# EAGLE board imu_interface (EAGLE 4.16)
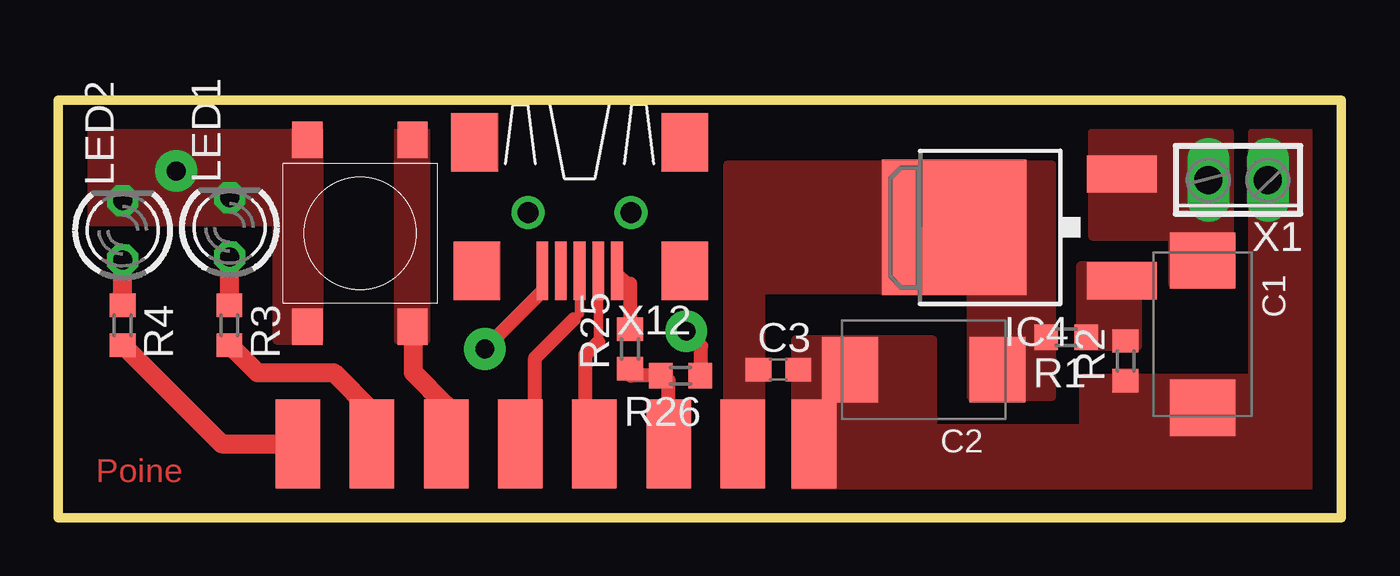
[diagram p0: board, top side]
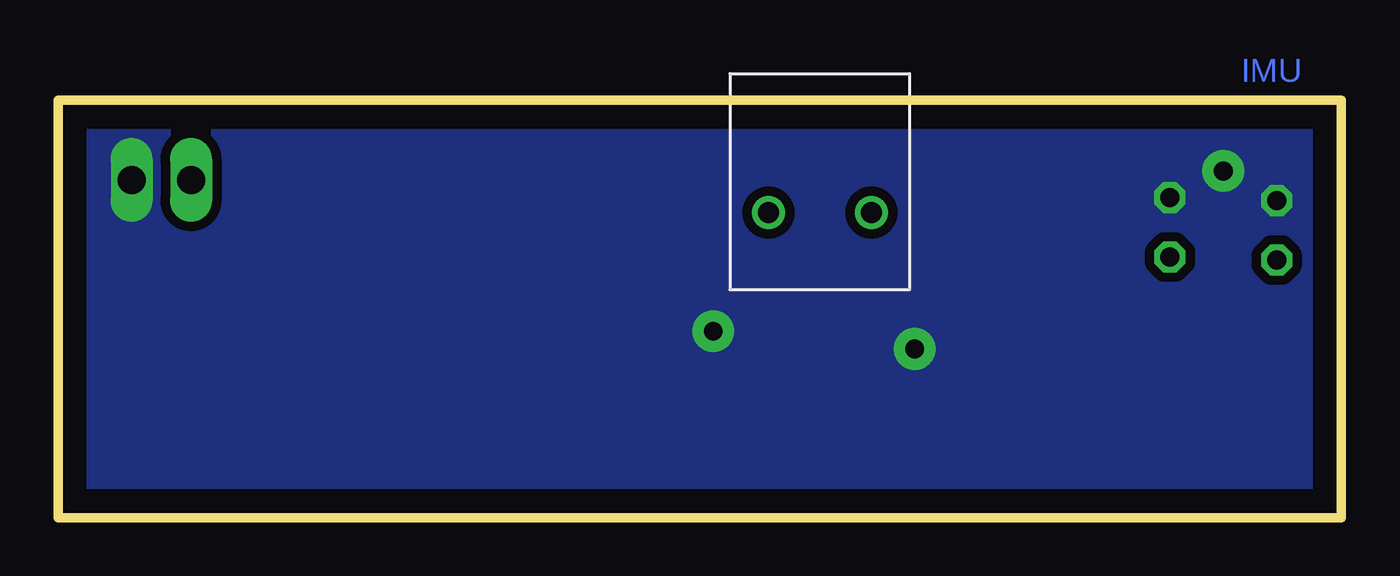
[diagram p1: board, bottom side, seen from below]

Size 54.91 x 17.89 mm. Coordinates in mm from the lower left corner, seen from the top.
Outline: 0,17.89 0,0 54.91,0 54.91,17.89 0,17.89
Copper layers (1*16): Top 0.035mm / dielectric 1.5mm / Bottom 0.035mm
Design rules "default": minimum track width 10mil, minimum drill 24mil, track to track 8mil, track to pad 8mil, pad to pad 8mil, via to via 8mil, smd to smd 8mil, copper to edge 40mil, drill to drill 8mil, minimum pad ring 10mil, minimum via ring 8mil, stop-mask expansion 4mil, vias tented up to drill 0mil, thermal gap 10mil

## Footprints (pad centres in the part's own frame; a part is rotated, then mirrored left to right if it is on the bottom)
SMC_D = smd 2.4 x 2.8: + -3.15,0; - 3.15,0
C0603 = smd 1.1 x 1: 1 -0.85,0; 2 0.85,0
DPACK = smd 1.6 x 3: 1 -2.28,-4.8; 3 2.28,-4.8 | smd 5.8 x 6.2: 4 0,2.38
LED3MM = drill 0.813 octagon: A -1.27,0; K 1.27,0
SOLD_PAD_150_75 = smd 3.81 x 1.905: P$1 0,0
R0603 = smd 1 x 1.1: 1 -0.85,0; 2 0.85,0
B3S = smd 1.55 x 1.3: P$1 4,-2.25; P$2 -4,-2.25; P$3 4,2.25; P$4 -4,2.25
2POL254 = drill 1.2 long: 1 -1.27,0; 2 1.27,0
USB-MB-S = smd 2.5 x 0.5: D+ 2.5,0; D- 2.5,0.8; GND 2.5,-1.6; ID 2.5,-0.8; VBUS 2.5,1.6 | smd 2.5 x 2: P$1 -3,-4.5; P$2 -3,4.5; P$3 2.5,-4.4; P$4 2.5,4.5 | drill 0.9 round: P$5 0,2.2; P$6 0,-2.2

## Placement (x,y rotation side)
C1  [SMC_D]  48.98,7.86 270 top
C2  [SMC_D]  37.05,6.34 180 top
C3  100nF  [C0603]  30.82,6.34 0 top
IC4  LM317MABDT  [DPACK]  40.73,12.43 90 top
LED1  [LED3MM]  7.33,12.43 90 top
LED2  [LED3MM]  2.76,12.3 90 top
P1  SOLDER_PAD150_75  [SOLD_PAD_150_75]  32.35,3.16 270 top
P2  SOLDER_PAD150_75  [SOLD_PAD_150_75]  29.3,3.16 270 top
P3  SOLDER_PAD150_75  [SOLD_PAD_150_75]  26.12,3.16 270 top
P4  SOLDER_PAD150_75  [SOLD_PAD_150_75]  22.95,3.16 270 top
P5  SOLDER_PAD150_75  [SOLD_PAD_150_75]  19.77,3.16 270 top
P6  SOLDER_PAD150_75  [SOLD_PAD_150_75]  16.6,3.16 270 top
P7  SOLDER_PAD150_75  [SOLD_PAD_150_75]  13.42,3.16 270 top
P8  SOLDER_PAD150_75  [SOLD_PAD_150_75]  10.25,3.16 270 top
R1  10K  [R0603]  43.14,7.73 180 top
R2  10K  [R0603]  45.68,6.72 90 top
R3  470R  [R0603]  7.33,8.24 270 top
R4  470R  [R0603]  2.76,8.24 270 top
R25  3.3K  [R0603]  24.47,7.22 90 top
R26  4.7K  [R0603]  26.63,6.08 180 top
U$1  B3S  [B3S]  12.92,12.18 90 top
X1  [2POL254]  50.51,14.46 180 top
X12  USB-MB-S  [USB-MB-S]  22.31,13.07 270 top

## Library data of the parts
C1-C3 R1-R4 R25 R26 = rcl
IC4 = v-reg
LED1 LED2 = led
P1-P8 U$1 = paparazzi
X1 = con-phoenix-254
X12 = con-usb

## Nets
+6V: C2.+ C3.1 IC4.4 P2.P$1 R1.2
GND: C1.- C2.- C3.2 LED1.K LED2.K P1.P$1 R2.1 R26.1 U$1.P$3 U$1.P$4 X1.1 X12.GND
N$1: LED1.A R3.1
N$2: LED2.A R4.1
N$3: P7.P$1 R3.2
N$4: P8.P$1 R4.2
N$24: R25.2 X12.VBUS
N$26: IC4.1 R1.1 R2.2
RESET: P6.P$1 U$1.P$1 U$1.P$2
USB+: P5.P$1 X12.D+
USB-: P4.P$1 X12.D-
USB_VBUS: P3.P$1 R25.1 R26.2
VBAT: C1.+ IC4.3 X1.2

## Tracks (layer width: path | path; a pad name or v marks a point on that pad's centre or on a via)
+6V
  pour Top (isolate 0.406, no thermals): 42.51,5.19 42.51,15.1 28.66,15.1 28.66,1.51 30.06,1.51 30.06,9.76 39.08,9.76 39.08,5.19
GND  (via drill 0.8 pad 1.78)
  Top 0.406: R26.1 27.52,6.08 | X12.GND 20.71,9.69 20.66,9.64
  Top 0.61: v18.25,7.22 20.66,9.64 | v26.89,7.99 27.52,7.35 27.52,6.08
  Top 1.626: C1.- 48.98,4.68
  other vias: 5.04,14.84
  pour Top (isolate 0.406, no thermals): 53.68,16.49 53.68,0.75 31.59,0.75 31.59,7.61 37.43,7.61 37.43,3.8 43.9,3.8 43.9,5.95 51.14,5.95 51.14,16.49
  pour Top (isolate 0.406, no thermals): 11.14,7.61 11.14,16.75 0.72,16.75 0.72,12.69 9.36,12.69 9.36,7.61
  pour Bottom (isolate 0.406, no thermals): 54.83,17.26 54.83,0.24 0.09,0.24 0.09,17.26
N$1
  Top 0.813: R3.1 LED1.A
N$2
  Top 0.813: 2.76,9 R4.1 LED2.A
N$3
  Top 0.813: R3.2 8.51,6.21 11.77,6.21 13.42,4.56 P7.P$1
N$4
  Top 0.813: R4.2 6.99,3.16 P8.P$1
N$24
  Top 0.406: X12.VBUS 24.47,10.02
  Top 0.61: 24.47,10.02 R25.2
N$26
  pour Top (isolate 0.406, no thermals): 46.19,7.35 46.19,10.78 43.78,10.78 43.78,7.35
RESET
  Top 0.813: P6.P$1 16.6,4.81 15.2,6.21 15.2,8.49 15.17,8.46 U$1.P$2
  pour Top (isolate 0.406, no thermals): 15.71,16.75 15.71,7.61 14.57,7.61 14.57,16.75
USB+
  Top 0.406: 22.06,8.49 22.31,8.75 X12.D+ | P5.P$1 20.41,3.16
  Top 0.61: 22.06,8.49 20.41,6.84 20.41,3.16
USB-
  Top 0.406: 23.11,7.52 X12.D- | 22.57,3.29 22.82,3.29 P4.P$1
  Top 0.61: 23.11,7.52 22.57,6.97 22.57,3.29
USB_VBUS
  Top 0.406: 26,6.08 R26.2 26.12,5.87 | 24.51,6.08 R25.1
  Top 0.61: R26.2 24.51,6.08 | P3.P$1 26.12,5.87
VBAT
  pour Top (isolate 0.406, no thermals): 50.13,10.02 50.13,16.49 44.28,16.49 44.28,12.05 47.71,12.05 47.71,10.02

## Text on the board
Top: Poine
Bottom: IMU